# Altium PCB HCHO_Benchmark_B2.PcbDoc
Units mm, origin at the board's own origin, x right, y up, seen from the top; angles counter-clockwise.
Board outline 88 x 66 mm, 2 copper layers (Top Layer, Bottom Layer), stack 1.671 mm thick; 39 components, 36 nets, 120 pads, 43 vias.
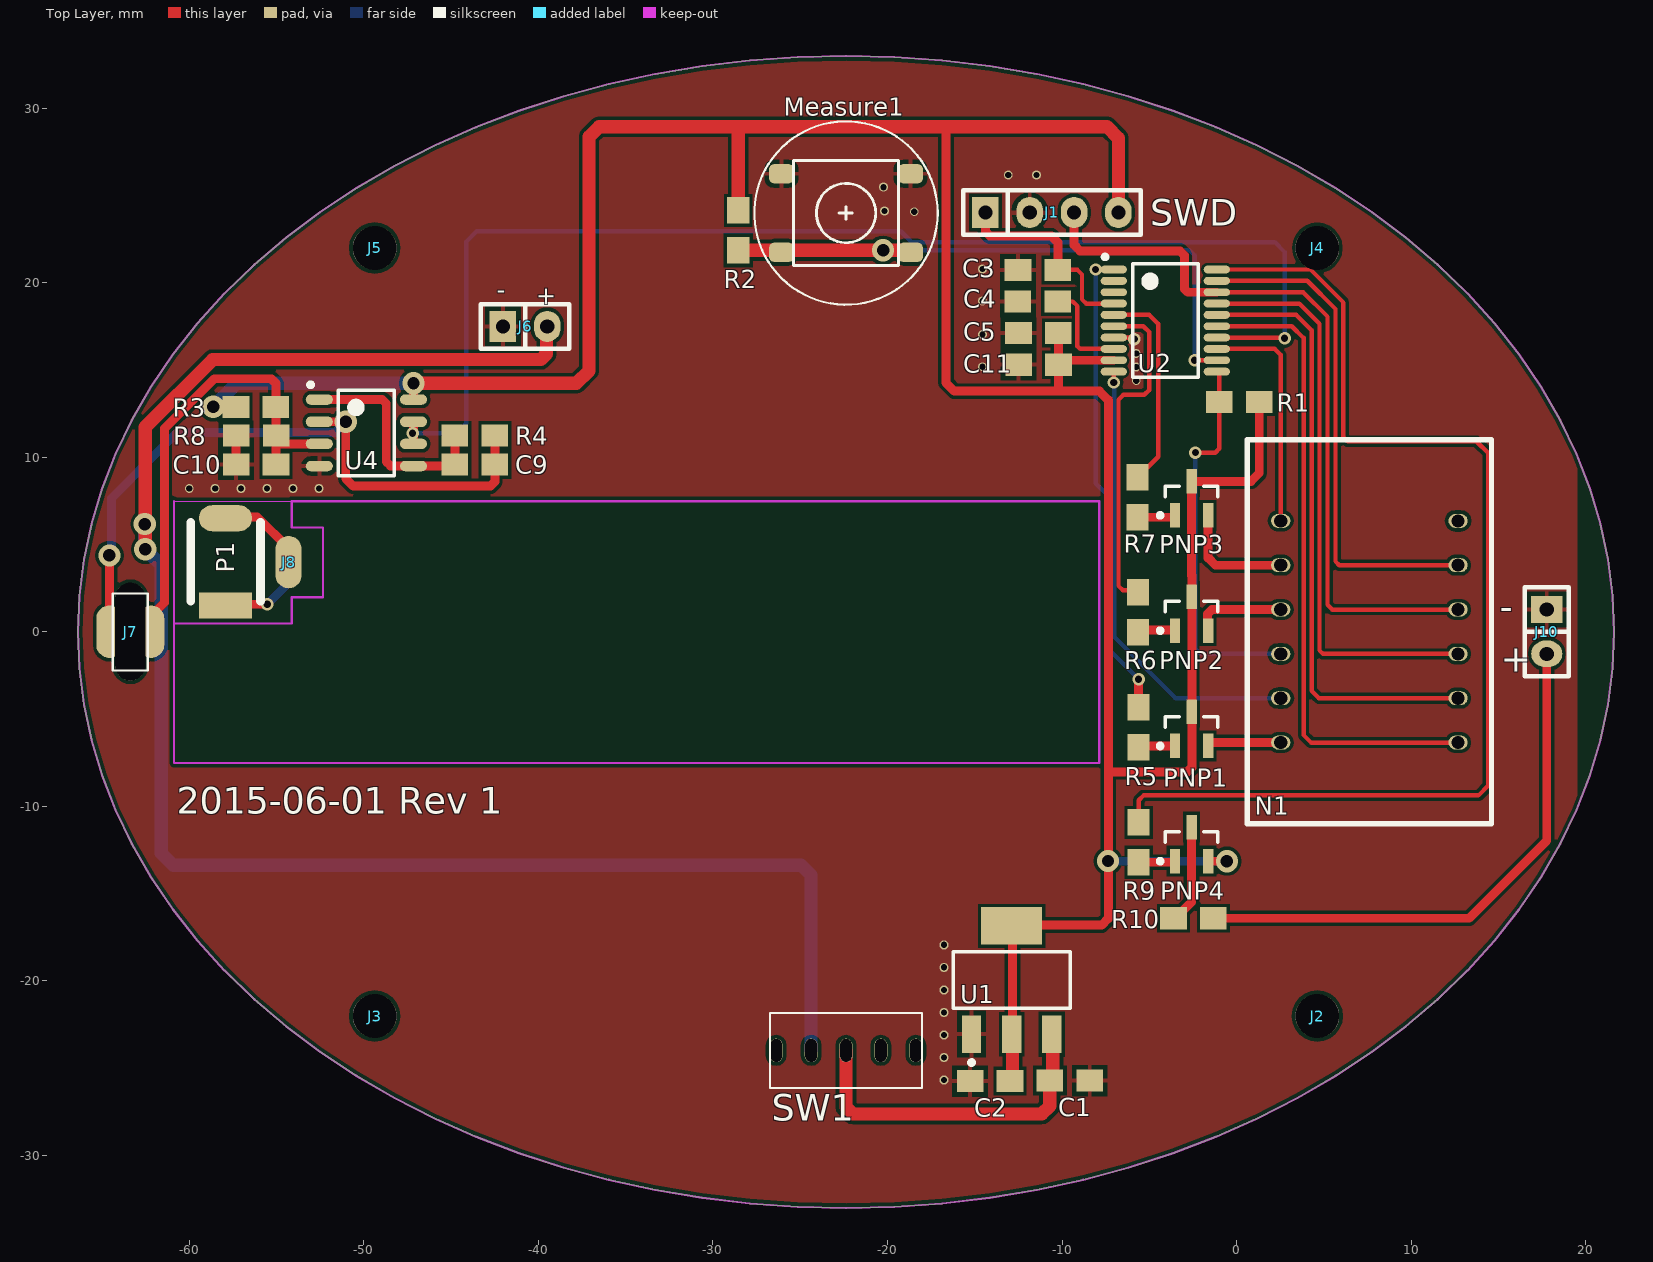
[diagram p0: Top Layer view]
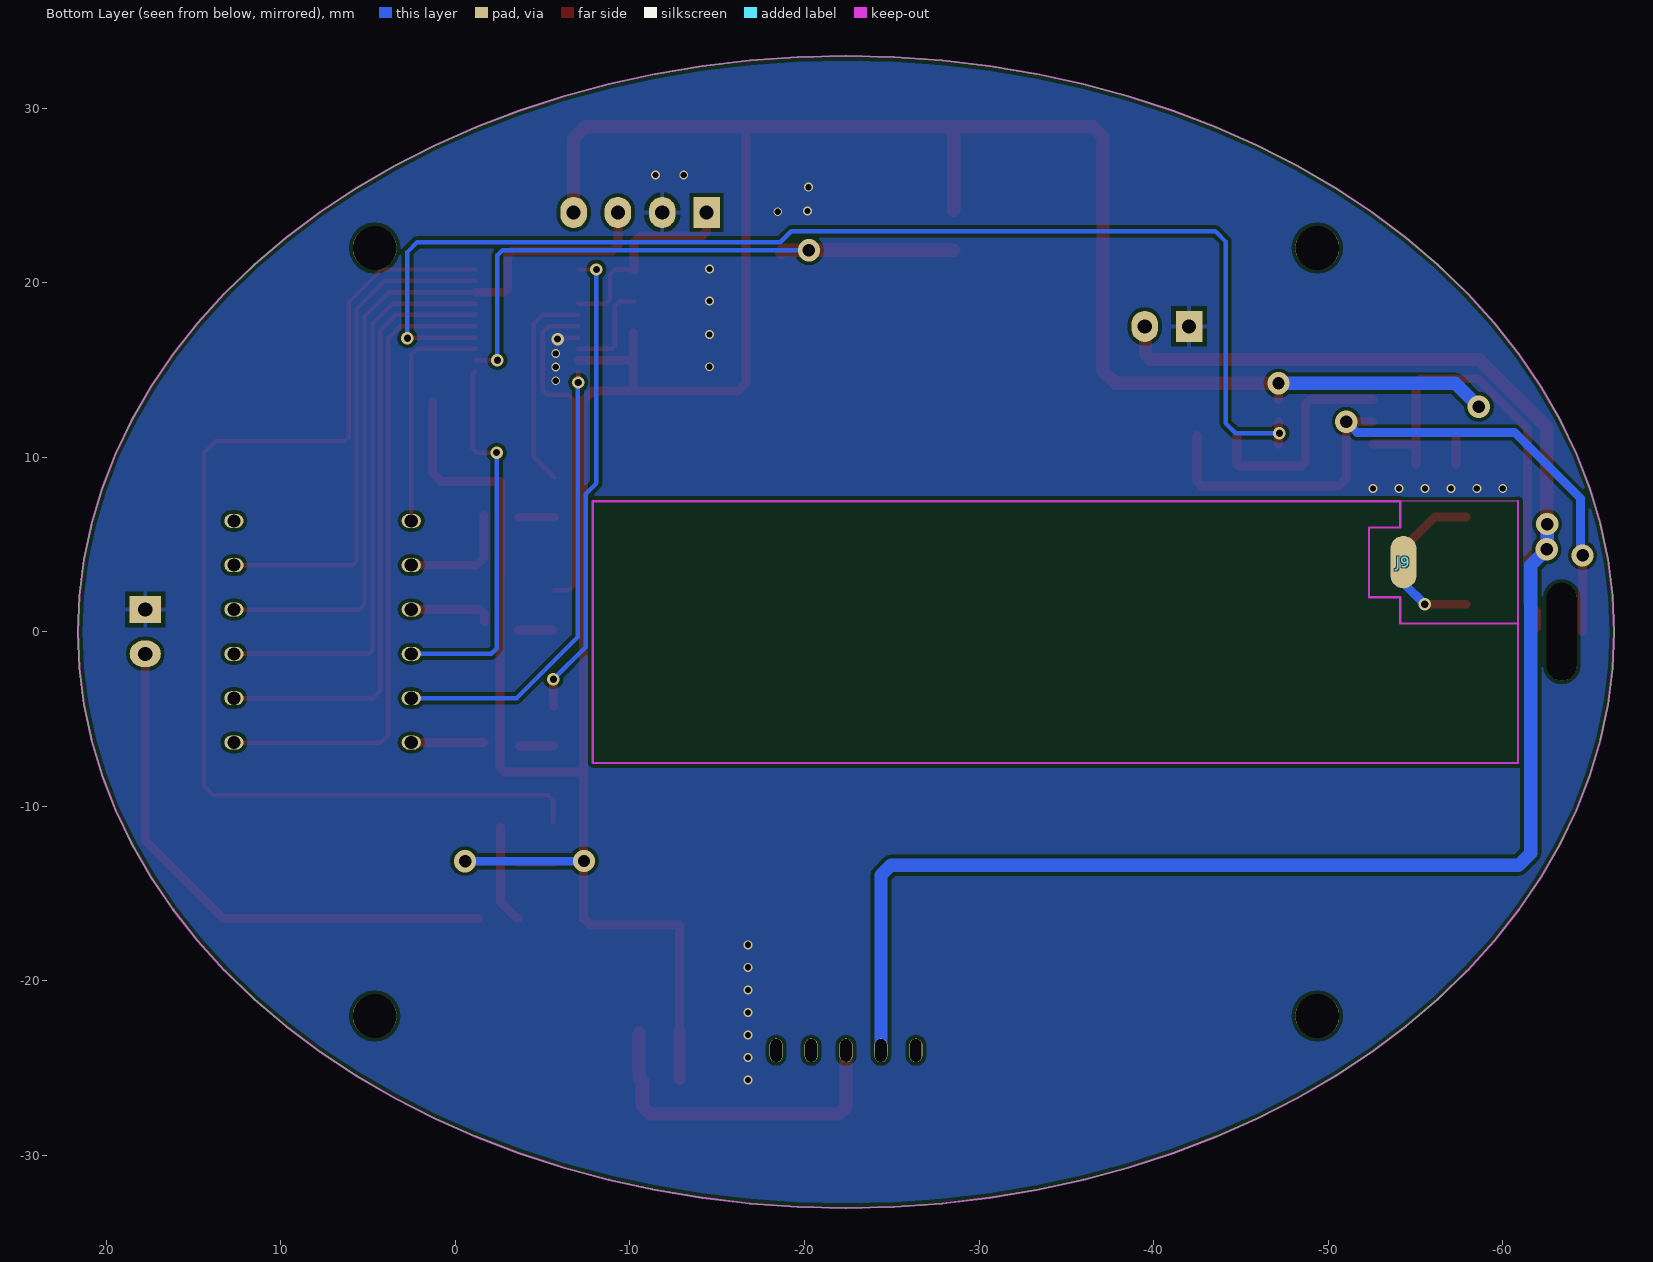
[diagram p1: Bottom Layer view, seen from below]

## Layer stack, top to bottom
Top Layer: signal copper 0.0356
Dielectric: core 1.6, FR-4, Dk 4.8
Bottom Layer: signal copper 0.0356

## Board outline
-59.527,-17.697 -60.934,-15.913 -62.189,-14.066 -63.286,-12.163 -64.223,-10.213 -64.994,-8.222 -65.597,-6.199 -66.029,-4.151 -66.289,-2.087 -66.376,-0.015 -66.289,2.057 -66.029,4.121 -65.597,6.168 -64.994,8.192 -64.223,10.182 -63.286,12.133 -62.189,14.036 -60.934,15.883 -59.527,17.667 -57.973,19.382 -56.279,21.02 -54.451,22.575 -52.496,24.041 -50.423,25.412 -48.239,26.682 -45.953,27.848 -43.573,28.903 -41.111,29.844 -38.574,30.667 -35.973,31.37 -33.319,31.948 -30.621,32.4 -27.891,32.725 -25.139,32.92 -22.376,32.985 -19.613,32.92 -16.862,32.725 -14.131,32.4 -11.434,31.948 -8.779,31.37 -6.179,30.667 -3.642,29.844 -1.179,28.903 1.2,27.848 3.486,26.682 5.67,25.412 7.744,24.041 9.698,22.575 11.526,21.02 13.221,19.382 14.774,17.667 16.181,15.883 17.436,14.036 18.534,12.133 19.47,10.182 20.241,8.192 20.844,6.168 21.277,4.121 21.537,2.057 21.624,-0.015 21.537,-2.087 21.277,-4.151 20.844,-6.199 20.241,-8.222 19.47,-10.213 18.534,-12.163 17.436,-14.066 16.181,-15.913 14.774,-17.697 13.221,-19.412 11.526,-21.05 9.698,-22.605 7.744,-24.071 5.67,-25.442 3.486,-26.713 1.2,-27.878 -1.179,-28.933 -3.642,-29.874 -6.179,-30.698 -8.779,-31.4 -11.434,-31.978 -14.131,-32.431 -16.862,-32.755 -19.613,-32.95 -22.376,-33.015 -25.139,-32.95 -27.891,-32.755 -30.621,-32.431 -33.319,-31.978 -35.973,-31.4 -38.574,-30.698 -41.111,-29.874 -43.573,-28.933 -45.953,-27.878 -48.239,-26.713 -50.423,-25.442 -52.496,-24.071 -54.451,-22.605 -56.279,-21.05 -57.973,-19.412

## Design rules (kind name [scope] priority, off if disabled: settings)
Clearance "6mil Special" [(HasFootprint('FPC 0.5mm 4P') OR HasFootprint('FPC 0.5mm 16P') OR HasFootprint('QFN40P500X500X90_HS-41L') OR HasFootprint('STM8S003F3P6'))] p1: gap=0.152
Clearance "8mil all" [All] p2: gap=0.203
ComponentClearance [All] p1: gap=-100 collisioncheckmode=3 verticalgap=0.254 showdistances=FALSE
Height [All] p1: minheight=0 maxheight=50.8 prefheight=12.7
HoleSize [All] p1: absolutevalues=TRUE maxlimit=1817.048 minlimit=0 maxpercent=80.000 minpercent=20.000
HoleToHoleClearance [All] p1: gap=0.203 allowstackedmicrovias=TRUE
MinimumSolderMaskSliver [All] p1: minsoldermaskwidth=0
PolygonConnect PolygonConnect_1 [isvia] p1: connectstyle=Direct reliefconductorwidth=0.254 reliefentries=4 polygonreliefangle="90 Angle" airgapwidth=0.254
PolygonConnect [All] p2: connectstyle=Relief reliefconductorwidth=0.254 reliefentries=4 polygonreliefangle="90 Angle" airgapwidth=0.254
RoutingCorners [All] p1: cornerstyle=45-Degree minsetback=0.254 maxsetback=2.54
RoutingVias [All] p1: holewidth=0.356 width=0.508 viastyle="Through Hole" minholewidth=0.356 minwidth=0.508 maxholewidth=2.54 maxwidth=5.08
SilkToSilkClearance [All] p1: silktosilkclearance=0
SilkToSolderMaskClearance [IsPad] p1: minsilkscreentomaskgap=0 clearancetoexposedcopper=TRUE
SolderMaskExpansion [All] p1: expansion=0.102
Width 20mil_Power [(InNet('EP_SUPPLY&VBAT') OR InNet('PSUPPLY') OR InNet('P_3.3V') OR InNet('PSUPPLYBAT') OR InNet('P_3.3V') OR InNet('P_5V'))] p1: maxlimit=1000 minlimit=0.203 preferedwidth=0.508
Width 8mil_Basic [All] p2: maxlimit=100 minlimit=0.203 preferedwidth=0.254
20 further rules are at their usual default settings.

## Components (designator, comment, footprint, x,y, rotation, side; value= is the part's Value field where it differs from the comment)
C1 "10uf" C0805 -9.555,-25.716 r0 top
C2 "10uf" C0805 -14.125,-25.742 r180 top
C3 "1uf" C0805 -11.38,20.724 r0 top
C4 "1uf" C0805 -11.393,18.915 r0 top
C5 "1uf" C0805 -11.353,17.106 r180 top
C9 "1uf" C0805 -43.635,9.584 r0 top
C10 "10uf" C0805 -56.172,9.584 r180 top
C11 "10uf" C0805 -11.348,15.296 r180 top
J1 "CON4" CON4 -10.581,24.015 r0 top
J2 "CON1" 2.5MM 4.624,-22.015 r0 top
J3 "CON1" 2.5MM -49.376,-22.015 r0 top
J4 "CON1" 2.5MM 4.624,21.985 r0 top
J5 "CON1" 2.5MM -49.376,21.985 r0 top
J6 "CON2" CON2 -40.76,17.49 r0 top
J7 "CON1X2_PCB" CON1X2_PCB -63.375,0 r270 top
J8 "CON1_PCB" CON1_PCB#1 -54.307,4.001 r90 top
J9 "CON1_PCB" CON1_PCB#2 -54.307,3.984 r90 top
J10 "CON2" CON2 17.766,0 r270 top
Measure1 "Patch_6x6x5" PATCH6X6X5 -22.376,23.985 r180 top
N1 "LG3631BH" LG3631BH 7.606,0 r90 top
P1 "photodetector" BPW34 -57.917,4 r90 top
PNP1 "8550" SOT23-3 -2.58,-5.568 r90 top
PNP2 "8550" SOT23-3 -2.58,1.036 r90 top
PNP3 "8550" SOT23-3 -2.58,7.64 r90 top
PNP4 "8550" SOT23-3 -2.58,-12.172 r90 top
R1 "1K" R0805 0.155,13.168 r0 top
R2 "1K" R0805 -28.548,22.991 r90 top
R3 "1K" R0805 -56.178,12.88 r180 top
R4 "1K" R0805 -43.635,11.236 r180 top
R5 "1K" R0805 -5.612,-5.477 r90 top
R6 "1K" R0805 -5.648,1.112 r90 top
R7 "1K" R0805 -5.669,7.702 r90 top
R8 "1K" R0805 -56.168,11.236 r0 top
R9 "1K" R0805 -5.612,-12.067 r90 top
R10 "1K" R0805 -2.475,-16.412 r0 top
SW1 "SS13F44" SS13F44 -22.376,-23.985 r180 top
U1 "1117-3.3" SOT223 -12.886,-19.956 r0 top
U2 "STM8S003F3P6" STM8S003F3P6 -4.086,17.824 r0 top
U4 "LMV358" LMV358_SOP -49.85,11.396 r0 top

## Footprints (in the part's own frame and the unit in brackets; to place one, negate y for a bottom-side part, rotate by r counter-clockwise, add the part's x,y. Pads: shape width x height; smd on the part's side, far side on the other; paste and mask are expansions set on the pad)
2.5MM [mm]
  round 2.5 hole 2.5: 1(0,0)
BPW34 [mm]
  rect 1.5x3.048 smd: A(-2.5,0)
  oval 1.5x3.048 smd: C(2.5,0)
  silkscreen extent -2.25,-2 2.25,2
C0805 [mil]
  rect 60x50 smd: 1(-45,0) 2(45,0)
  body extent -52,-25 55,25, height 31
CON1_PCB#1 [mm]
  oval 3x1.5 smd: 1(-0.017,0)
CON1_PCB#2 [mm]
  oval 3x1.5 smd far side: 1(0,0)
CON1X2_PCB [mm]
  oval 5.6x1.7 hole 1.7 slot 5.6 at 0 deg unplated: 0(0,0)
  oval 3x1.5 smd: 1(0,1.2) 2(0,-1.2)
CON2 [mil]
  rect 60x70 hole 32: 1(-50,0)
  oval 60x70 hole 32: 2(50,0)
  silkscreen extent -100,-50 100,50, body extent -101,-50 100,50, height 295
CON4 [mil]
  rect 60x70 hole 32: 1(-150,0)
  oval 60x70 hole 32: 2(-50,0) 3(50,0) 4(150,0)
  silkscreen extent -200,-50 200,50, body extent -201,-50 199,50, height 295
LG3631BH [mm]
  oval 0.8x1.1 hole 0.75: 1(-6.35,-5.08) 2(-3.81,-5.08) 3(-1.27,-5.08) 4(1.27,-5.08) 5(3.81,-5.08) 6(6.35,-5.08) 7(6.35,5.08) 8(3.81,5.08) 9(1.27,5.08) 10(-1.27,5.08) 11(-3.81,5.08) 12(-6.35,5.08)
  silkscreen extent -11,-7 11,7, body extent -10.98,-6.99 10.99,7, height 7.3
LMV358_SOP [mm] "TSOP, 8-Leads, Body 3.00x3.00mm, Pitch 0.65mm, IPC Medium Density"
  oval 1.55x0.6 smd: 1(-2.7,1.905) 2(-2.7,0.635) 3(-2.7,-0.635) 4(-2.7,-1.905) 5(2.7,-1.905) 6(2.7,-0.635) 7(2.7,0.635) 8(2.7,1.905)
  silkscreen extent -3.32,-2.45 1.6,2.87, body extent -1.95,-2.47 1.93,2.46, height 1.1
PATCH6X6X5 [mm]
  rrect50% 1.4x1.1 smd: 1(-3.7,2.25) 2(3.7,2.25) 3(3.7,-2.25) 4(-3.7,-2.25)
  silkscreen extent -3,-3 3,3, body extent -4.13,-3 4.13,3, height 5
R0805 [mil]
  rect 60x50 smd: 1(-45,0) 2(45,0)
  body extent -52,-25 55,25, height 31
SOT23-3 [mm]
  rect 1.4x0.6 smd: 1(-0.975,0.95) 2(-0.975,-0.95) 3(0.975,0)
  silkscreen extent -1.1,-1.5 0.7,1.92, body extent -0.7,-1.5 0.7,1.5, height 1
SOT223 [mm]
  rect 1.1x2.15 smd: 1(-2.3,-3.1) 2(0,-3.1) 3(2.3,-3.1)
  rect 3.5x2.15 smd: 4(0,3.1)
  silkscreen extent -3.35,-4.85 3.35,1.63, body extent -3.3,-3.2 3.3,3.1, height 1.7
SS13F44 [mm]
  oval 0.75x1.35 hole 0.65 slot 1.3 at 90 deg: 1(-4,0) 2(-2,0) 3(0,0) 4(2,0) 5(4,0)
  silkscreen extent -4.35,-2.15 4.35,2.15, body extent -4.35,-2.15 4.35,2.15, height 5.9
STM8S003F3P6 [mm]
  oval 1.5x0.45 smd: 1(-2.95,2.925) 2(-2.95,2.275) 3(-2.95,1.625) 4(-2.95,0.975) 5(-2.95,0.325) 6(-2.95,-0.325) 7(-2.95,-0.975) 8(-2.95,-1.625) 9(-2.95,-2.275) 10(-2.95,-2.925) 11(2.95,-2.925) 12(2.95,-2.275) 13(2.95,-1.625) 14(2.95,-0.975) 15(2.95,-0.325) 16(2.95,0.325) 17(2.95,0.975) 18(2.95,1.625) 19(2.95,2.275) 20(2.95,2.925)
  silkscreen extent -3.57,-3.25 1.88,3.77, body extent -2.22,-3.25 2.2,3.24, height 1.2

## Part data
C1 C2 C3 C4 C5 C9 C10 C11: library part C
PNP1 PNP2 PNP3 PNP4: library part PNP
R1 R2 R3 R4 R5 R6 R7 R8 R9 R10: library part R
U1: library part 1117

## Via types
v1: diameter 0.508, hole 0.356, Top Layer to Bottom Layer, 25 vias
v2: diameter 1.27, hole 0.711, Top Layer to Bottom Layer, 9 vias
v3: diameter 0.711, hole 0.406, Top Layer to Bottom Layer, 9 vias

## Nets (pads, with @x,y where several pads share a name; then routed paths per layer and width w, separated by ;. In a path a pad name is that pad's centre, name@x,y a point inside that pad or via, vN(x,y) a via of type N, cw(c..) or ccw(c..) an arc to the next point about the centre after c; other vN are vias at no path point)
-INA: C9.2 J7.2 R4.1 U4.2 | length 39.2
  Top Layer w0.508: J7.2 v2(-64.575,4.372) ; U4.2 v2(-51.035,12.031) -51.035,8.77 -50.603,8.339 -42.745,8.339 -42.492,8.591 C9.2 R4.1
  Bottom Layer w0.508: v2(-64.575,4.372) -64.458,4.489 -64.458,7.63 -60.675,11.413 -51.653,11.413 v2(-51.035,12.031)
C_LASER: R9.2 U2.20 | length 65.1
  Top Layer w0.254: R9.2 -5.612,-9.658 -5.332,-9.378 13.854,-9.378 14.403,-8.83 14.403,10.245 13.733,10.915 6.355,10.915 6.121,11.148 6.121,18.857 4.229,20.749 U2.20
GND: C1.2 C2.2 C3.1 C4.1 C5.2 C10.2 C11.2 J1.2 J6.1 J10.1 Measure1.3 Measure1.4 R8.1 U1.1 U2.7 U4.4 | length 2.8
  Top Layer w0.254: U2.7 -6.124,16.849 v3@-6.088,16.813
  Top Layer w0.508: C10.2@-57.311,9.589 R8.1
  Bottom Layer w0.254: v3@-6.088,16.813 v3@-5.85,16.813
  other v1: -16.754,-25.675 -16.754,-24.385 -16.754,-23.096 -16.754,-21.806 -16.754,-20.517 -16.754,-19.227 -16.754,-17.937 -59.999,8.21 -58.513,8.21 -57.027,8.21 -55.54,8.21 -54.054,8.21 -52.568,8.21 -5.748,14.376 -5.748,15.156 -14.561,15.175 -5.748,15.936 -14.561,17.02 -14.55,18.941 -14.55,20.774 -18.468,24.056 -20.177,24.093 -20.227,25.465 -13.082,26.16 -11.458,26.164
  other v3: -5.856,16.759
HCHO_ADC: U2.14 U4.6 U4.7 | length 71.4
  Top Layer w0.254: U2.14 2.713,16.849 v3(2.749,16.812)
  Top Layer w0.508: U4.6 U4.7
  Bottom Layer w0.254: v3(-47.199,11.369) -44.697,11.369 -44.121,11.946 -44.121,22.352 -43.539,22.934 -19.235,22.934 -18.61,22.309 2.193,22.309 2.749,21.753 v3(2.749,16.812)
N_A: N1.11 U2.10 | length 26.2
  Top Layer w0.254: v3(-7.036,14.277) U2.10
  Bottom Layer w0.254: v3(-7.036,14.277) -7.019,14.26 -7.019,-0.294 -3.503,-3.81 N1.11
N_B: N1.7 U2.13 | length 13.3
  Top Layer w0.254: U2.13 2.185,16.199 2.526,15.858 N1.7
N_C: J1.3 N1.4 U2.18 | length 43.3
  Top Layer w0.254: U2.18 3.809,19.449 5.207,18.051 5.207,1.55 5.487,1.27 N1.4
  Top Layer w0.508: J1.3 -9.311,22.159 -8.97,21.818 -3.25,21.818 -2.994,21.562 -2.994,19.642 -2.801,19.449 U2.18
N_COM1: R5.2 U2.1 | length 27.1
  Top Layer w0.254: v3(-8.074,20.749) U2.1
  Top Layer w0.508: R5.2@-5.612,-4.266 v3(-5.612,-2.723)
  Bottom Layer w0.254: v3(-8.074,20.749) -8.074,8.494 -7.476,7.896 -7.476,-0.859 v3(-5.612,-2.723)
N_COM2: R6.2 U2.6 | length 19.4
  Top Layer w0.254: U2.6 -5.342,17.499 -5.012,17.169 -5.012,13.843 -5.283,13.572 -6.482,13.572 -6.765,13.289 -6.765,2.622 -6.53,2.387 R6.2@-5.648,2.387
N_COM3: R7.2 U2.5 | length 12
  Top Layer w0.254: U2.5 -5.004,18.149 -4.485,17.631 -4.485,10.028 R7.2
N_D: N1.2 U2.16 | length 35
  Top Layer w0.254: U2.16 3.41,18.149 4.292,17.266 4.292,-3.389 4.714,-3.81 N1.2
N_DP: N1.3 U2.17 | length 33.1
  Top Layer w0.254: U2.17 3.585,18.799 4.75,17.634 4.75,-1.072 4.948,-1.27 N1.3
N_E: N1.1 U2.15 | length 37
  Top Layer w0.254: U2.15 3.163,17.499 3.835,16.827 3.835,-5.918 4.267,-6.35 N1.1
N_F: N1.10 R1.1 U2.11 | length 22.2
  Top Layer w0.254: v3(-2.364,10.255) -1.226,10.255 -0.988,10.493 R1.1 -0.988,14.751 U2.11
  Bottom Layer w0.254: v3(-2.364,10.255) -2.364,-0.962 -2.057,-1.27 N1.10
N_G: N1.5 U2.19 | length 29
  Top Layer w0.254: U2.19 4.051,20.099 5.664,18.486 5.664,4.027 5.881,3.81 N1.5
NetC1_1: C1.1 SW1.3 U1.3 | length 19.3
  Top Layer w0.762: SW1.3 -22.376,-27.234 -21.985,-27.625 -11.151,-27.625 -10.698,-27.172 C1.1 ; C1.1@-10.535,-25.553 U1.3@-10.535,-23.001
NetC4_2: C4.2 U2.8 | length 5.7
  Top Layer w0.254: C4.2 -9.38,18.915 -9.118,18.652 -9.118,16.352 -8.965,16.199 U2.8
NetJ6_2: J6.2 SW1.4 | length 100.3
  Top Layer w0.762: v2(-62.517,4.72) -62.517,11.727 -58.652,15.592 -39.854,15.592 -39.536,15.91 J6.2@-39.536,17.42
  Bottom Layer w0.762: v2(-62.544,6.166) -62.544,4.747 -61.596,3.799 -61.596,-12.691 -60.906,-13.381 -24.952,-13.381 -24.376,-13.957 SW1.4
NetJ8_1: J8.1 P1.C | length 5.1
  Top Layer w0.508: P1.C@-57.886,6.572 -56.103,6.572 -54.307,4.776 J8.1
NetJ9_1: J9.1 P1.A | length 5.3
  Top Layer w0.508: P1.A@-57.886,1.572 v3(-55.528,1.572)
  Bottom Layer w0.508: v3(-55.528,1.572) -54.307,2.793 J9.1
NetJ10_2: J10.2 R10.2 | length 31.6
  Top Layer w0.508: R10.2 13.322,-16.412 17.766,-11.968 J10.2
NetN1_8: N1.8 PNP3.2 | length 6.8
  Top Layer w0.508: PNP3.2 -1.63,4.23 -1.211,3.81 N1.8
NetN1_9: N1.9 PNP2.2 | length 4.7
  Top Layer w0.508: PNP2.2@-1.672,0.591 -1.672,1.008 -1.415,1.265 N1.9@2.521,1.265
NetN1_12: N1.12 PNP1.2 | length 4.1
  Top Layer w0.508: PNP1.2@-1.63,-6.342 N1.12@2.518,-6.342
NetPNP1_1: PNP1.1 R5.1 | length 1.9
  Top Layer w0.508: R5.1@-5.612,-6.552 PNP1.1@-3.683,-6.552
NetPNP2_1: PNP2.1 R6.1 | length 2
  Top Layer w0.508: R6.1@-5.605,0.108 PNP2.1@-3.604,0.108
NetPNP3_1: PNP3.1 R7.1 | length 2
  Top Layer w0.508: R7.1 PNP3.1@-3.636,6.559
NetPNP4_1: PNP4.1 R9.1 | length 2
  Top Layer w0.508: R9.1 PNP4.1@-3.592,-13.21
NetPNP4_3: PNP4.3 R10.1 | length 5.7
  Top Layer w0.508: R10.1 -3.514,-16.412 -2.58,-15.478 PNP4.3
NRESET: C3.2 J1.1 U2.4 | length 11.9
  Top Layer w0.254: C3.2 -9.116,20.724 -8.856,20.464 -8.856,19.037 -8.618,18.799 U2.4
  Top Layer w0.508: J1.1 -14.391,22.933 -14.12,22.662 -10.596,22.662 -10.237,22.303 C3.2
OUT1: C9.1 R4.2 U4.1 U4.5 | length 12.9
  Top Layer w0.508: U4.1 -48.94,13.301 -48.712,13.072 -48.712,9.738 -48.464,9.491 U4.5 C9.1@-44.871,9.491 ; C9.1 R4.2
P_3.3V: C2.1 C5.1 C11.1 J1.4 PNP1.3 PNP2.3 PNP3.3 PNP4.2 R1.2 R2.2 R3.2 U1.2 U1.4 U2.9 U4.8 | length 189
  Top Layer w0.508: U4.8 v2(-47.15,14.229) ; -16.653,28.933 -16.653,14.267 -16.165,13.779 -10.205,13.779 ; U1.4 U1.4@-12.835,-16.805 ; U1.2@-12.835,-23.001 -12.835,-21.192 U1.4@-12.835,-16.805 ; U1.4@-12.835,-16.801 U1.4@-12.835,-16.805 ; C11.1@-10.21,15.301 C5.1 ; -7.274,-8.026 -2.818,-8.026 -2.564,-7.772 -2.564,3.199 -2.58,3.215 PNP3.3 0.822,8.615 1.298,9.09 R1.2 ; U2.9 -9.952,15.549 C11.1 -10.205,13.779 ; PNP4.2 v2(-0.556,-13.147) ; U1.4@-12.835,-16.805 -7.733,-16.805 -7.349,-16.422 -7.349,13.265 -7.863,13.779 -10.205,13.779
  Top Layer w0.762: v2(-47.15,14.229) -37.824,14.229 -37.095,14.957 -37.095,28.362 -36.524,28.933 -28.546,28.933 ; R2.2 -28.548,28.932 -28.546,28.933 ; C2.1@-12.835,-25.595 U1.2@-12.835,-23.001 ; J1.4 -6.771,28.281 -7.423,28.933 -16.653,28.933 -28.546,28.933
  Bottom Layer w0.508: v2(-7.368,-13.135) -7.355,-13.147 v2(-0.556,-13.147)
  Bottom Layer w0.762: v2(-58.627,12.887) -57.285,14.229 v2(-47.15,14.229)
TRRIGLE: Measure1.1 Measure1.2 R2.1 U2.12 | length 35.2
  Top Layer w0.254: v3(-2.409,15.549) U2.12
  Top Layer w0.762: R2.1 -18.789,21.848 Measure1.1
  Bottom Layer w0.254: v2(-20.251,21.852) -2.697,21.852 -2.409,21.563 v3(-2.409,15.549)
UART_RXD: U2.3
UART_TXD: U2.2
V0.58: C10.1 J7.1 R3.1 R8.2 U4.3 | length 26.5
  Top Layer w0.508: J7.1@-61.925,0.249 -61.925,1.163 -61.425,1.664 -61.425,11.634 -58.568,14.491 -55.296,14.491 -55.035,14.23 R3.1 -55.029,12.875 C10.1 ; R8.2@-55.025,10.902 -54.884,10.761 U4.3
pads on no net: J2.1 J3.1 J4.1 J5.1 J7.0 N1.6 SW1.1 SW1.2 SW1.5

## Polygon pours and split planes (outlines as drawn)
GND on Bottom Layer "Bottom Layer-No Net" (solid, remove dead copper, pour order 4): -62.004,37.279 28.975,37.279 28.975,-33.852 -71.979,-33.852 -71.979,37.38
GND on Top Layer "Bottom Layer-No Net" (solid, remove dead copper, pour order 3): -71.474,36.243 19.505,36.243 19.505,-34.888 -81.449,-34.888 -81.449,36.344

## Keep-outs
Keep-Out Layer:
  lines w0.025: -60.879,7.477 -54.129,7.477
  lines w0.127: -60.879,0.477 -54.129,0.477 -54.129,1.977 -52.329,1.977 -52.329,5.977 -54.129,5.977 -54.129,7.475 -7.87,7.475 ; -60.871,7.479 -60.871,-7.516 -7.885,-7.516 -7.87,-7.5 -7.87,7.468 ; -66.376,-0.015 -66.289,-2.087 -66.029,-4.151 -65.597,-6.199 -64.994,-8.222 -64.223,-10.213 -63.286,-12.163 -62.189,-14.066 -60.934,-15.913 -59.527,-17.697 -57.973,-19.412 -56.279,-21.05 -54.451,-22.605 -52.496,-24.071 -50.423,-25.442 -48.239,-26.713 -45.953,-27.878 -43.573,-28.933 -41.111,-29.874 -38.574,-30.698 -35.973,-31.4 -33.319,-31.978 -30.621,-32.431 -27.891,-32.755 -25.139,-32.95 -22.376,-33.015 -19.613,-32.95 -16.862,-32.755 -14.131,-32.431 -11.434,-31.978 -8.779,-31.4 -6.179,-30.698 -3.642,-29.874 -1.179,-28.933 1.2,-27.878 3.486,-26.713 5.67,-25.442 7.744,-24.071 9.698,-22.605 11.526,-21.05 13.221,-19.412 14.774,-17.697 16.181,-15.913 17.436,-14.066 18.534,-12.163 19.47,-10.213 20.241,-8.222 20.844,-6.199 21.277,-4.151 21.537,-2.087 21.624,-0.015 21.537,2.057 21.277,4.121 20.844,6.168 20.241,8.192 19.47,10.182 18.534,12.133 17.436,14.036 16.181,15.883 14.774,17.667 13.221,19.382 11.526,21.02 9.698,22.575 7.744,24.041 5.67,25.412 3.486,26.682 1.2,27.848 -1.179,28.903 -3.642,29.844 -6.179,30.667 -8.779,31.37 -11.434,31.948 -14.131,32.4 -16.862,32.725 -19.613,32.92 -22.376,32.985 -25.139,32.92 -27.891,32.725 -30.621,32.4 -33.319,31.948 -35.973,31.37 -38.574,30.667 -41.111,29.844 -43.573,28.903 -45.953,27.848 -48.239,26.682 -50.423,25.412 -52.496,24.041 -54.451,22.575 -56.279,21.02 -57.973,19.382 -59.527,17.667 -60.934,15.883 -62.189,14.036 -63.286,12.133 -64.223,10.182 -64.994,8.192 -65.597,6.168 -66.029,4.121 -66.289,2.057 -66.376,-0.015

## Silkscreen, mask and mechanical layers (free items; w line width, h text height)
Top Overlay:
  circle w0.127: c-22.376,23.985 r5.25
  lines w0.127: -64.376,-2.215 -64.376,2.185 -62.376,2.185 -62.376,-2.215 -64.376,-2.215
  text "SWD" at -4.96,23.247 h1.52
  text "+" at -39.983,19.777 h1.02 r270
  text "-" at -42.383,19.096 h1.02
  text "-" at 15.082,0.682 h1.52
  text "+" at 15.129,-2.299 h1.52
  text "2015-06-01 Rev 1" at -60.718,-10.423 h1.52
Mechanical 1:
  lines w0.127: -59.629,1.727 -59.629,6.227 -56.129,6.227 -56.129,1.727 -59.629,1.727
Mechanical 8:
  lines w0.127: -30.126,23.985 -27.376,23.985 ; -24.876,23.985 -22.376,23.985 ; -22.376,16.235 -22.376,18.985 ; -22.376,21.485 -22.376,23.985 ; -22.376,26.485 -22.376,23.985 ; -22.376,28.985 -22.376,31.735 ; -19.876,23.985 -22.376,23.985 ; -17.376,23.985 -14.626,23.985

## Text inside footprints (layer, text, board x,y; h text height)
U4: Mechanical 15 "1" at -49.4,11.231 h0.75 r90